# Altium PCB HCPL-3120 Gate Driver Circuit.PcbDoc
Units mm, origin at the board's own origin, x right, y up, seen from the top; angles counter-clockwise.
Board outline 71 x 57 mm, 2 copper layers (Top Layer, Bottom Layer), stack 1.1 mm thick; 42 components, 22 nets, 100 pads, 2 vias.
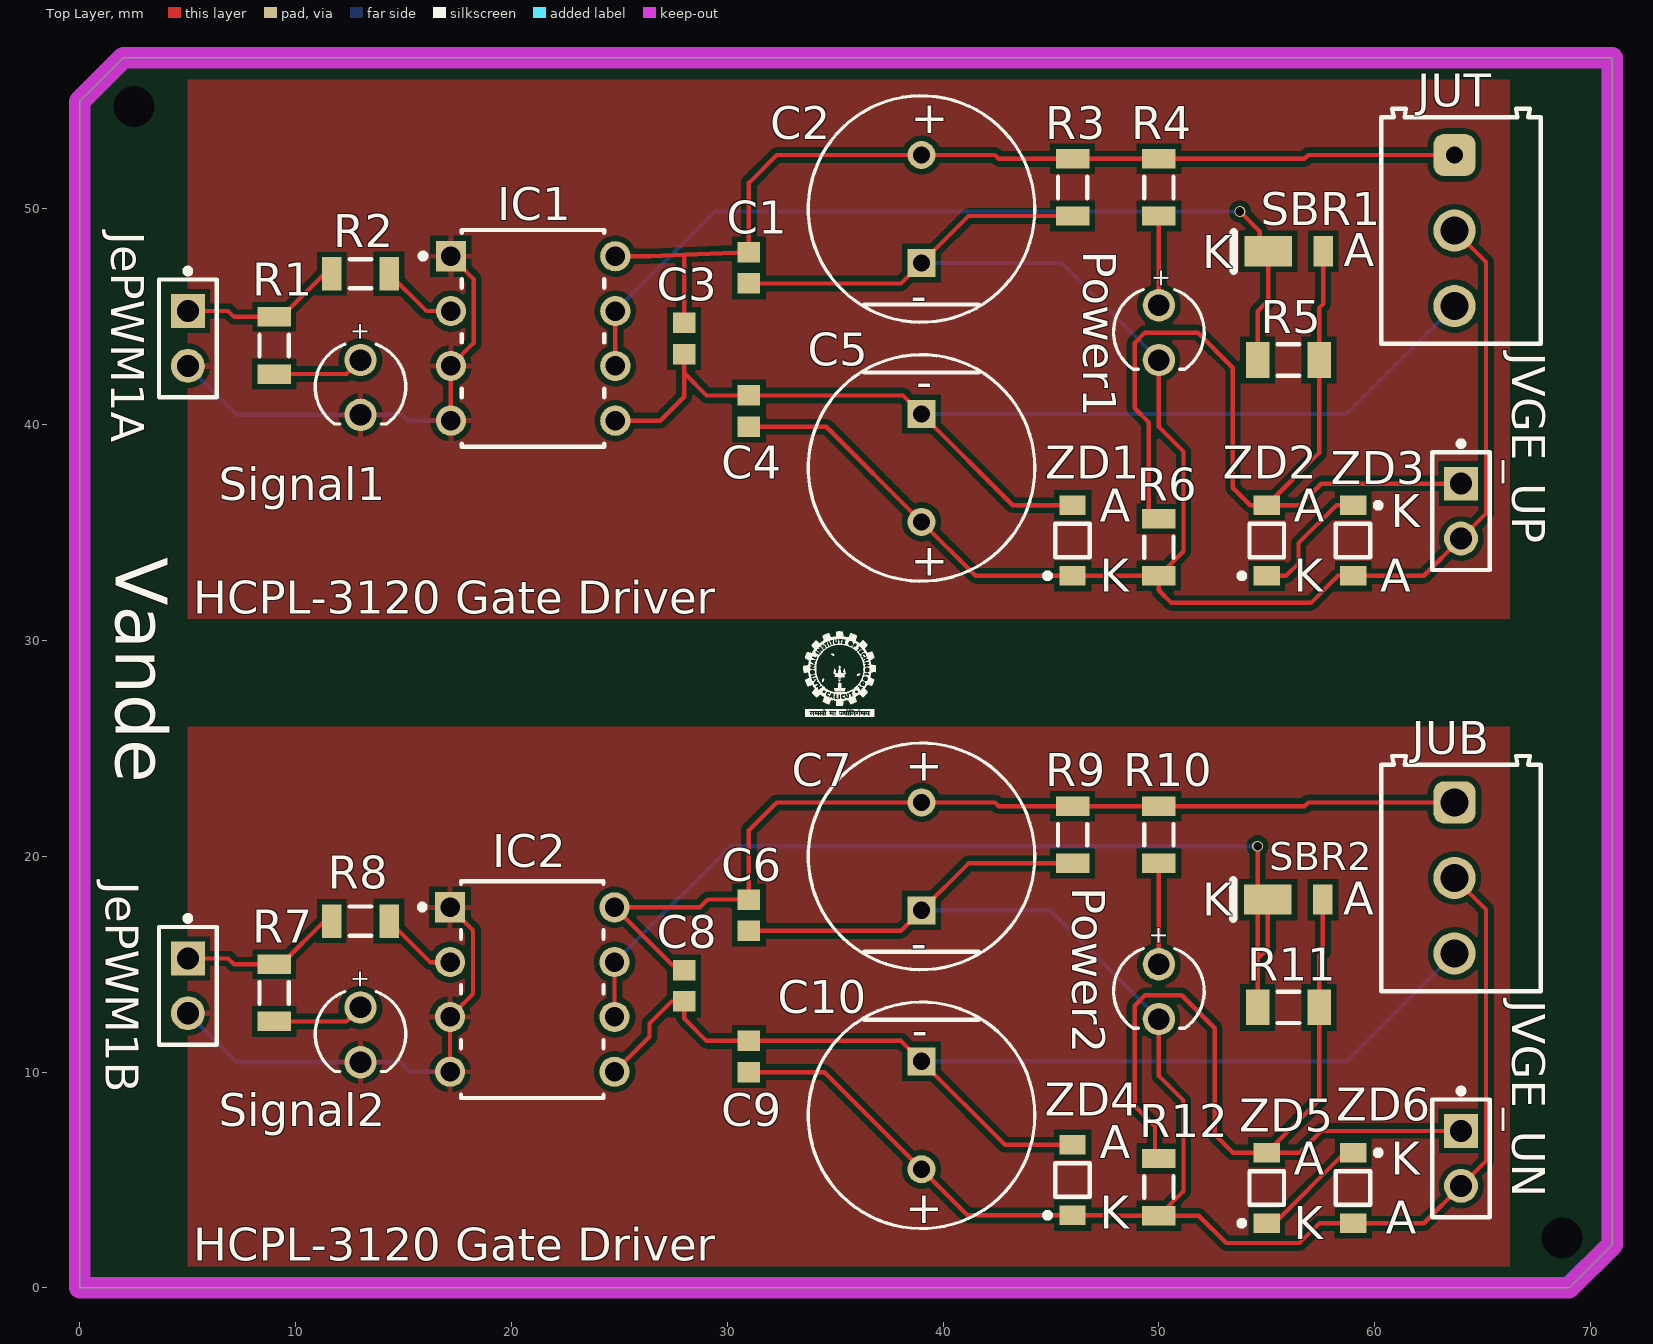
[diagram p0: Top Layer view]
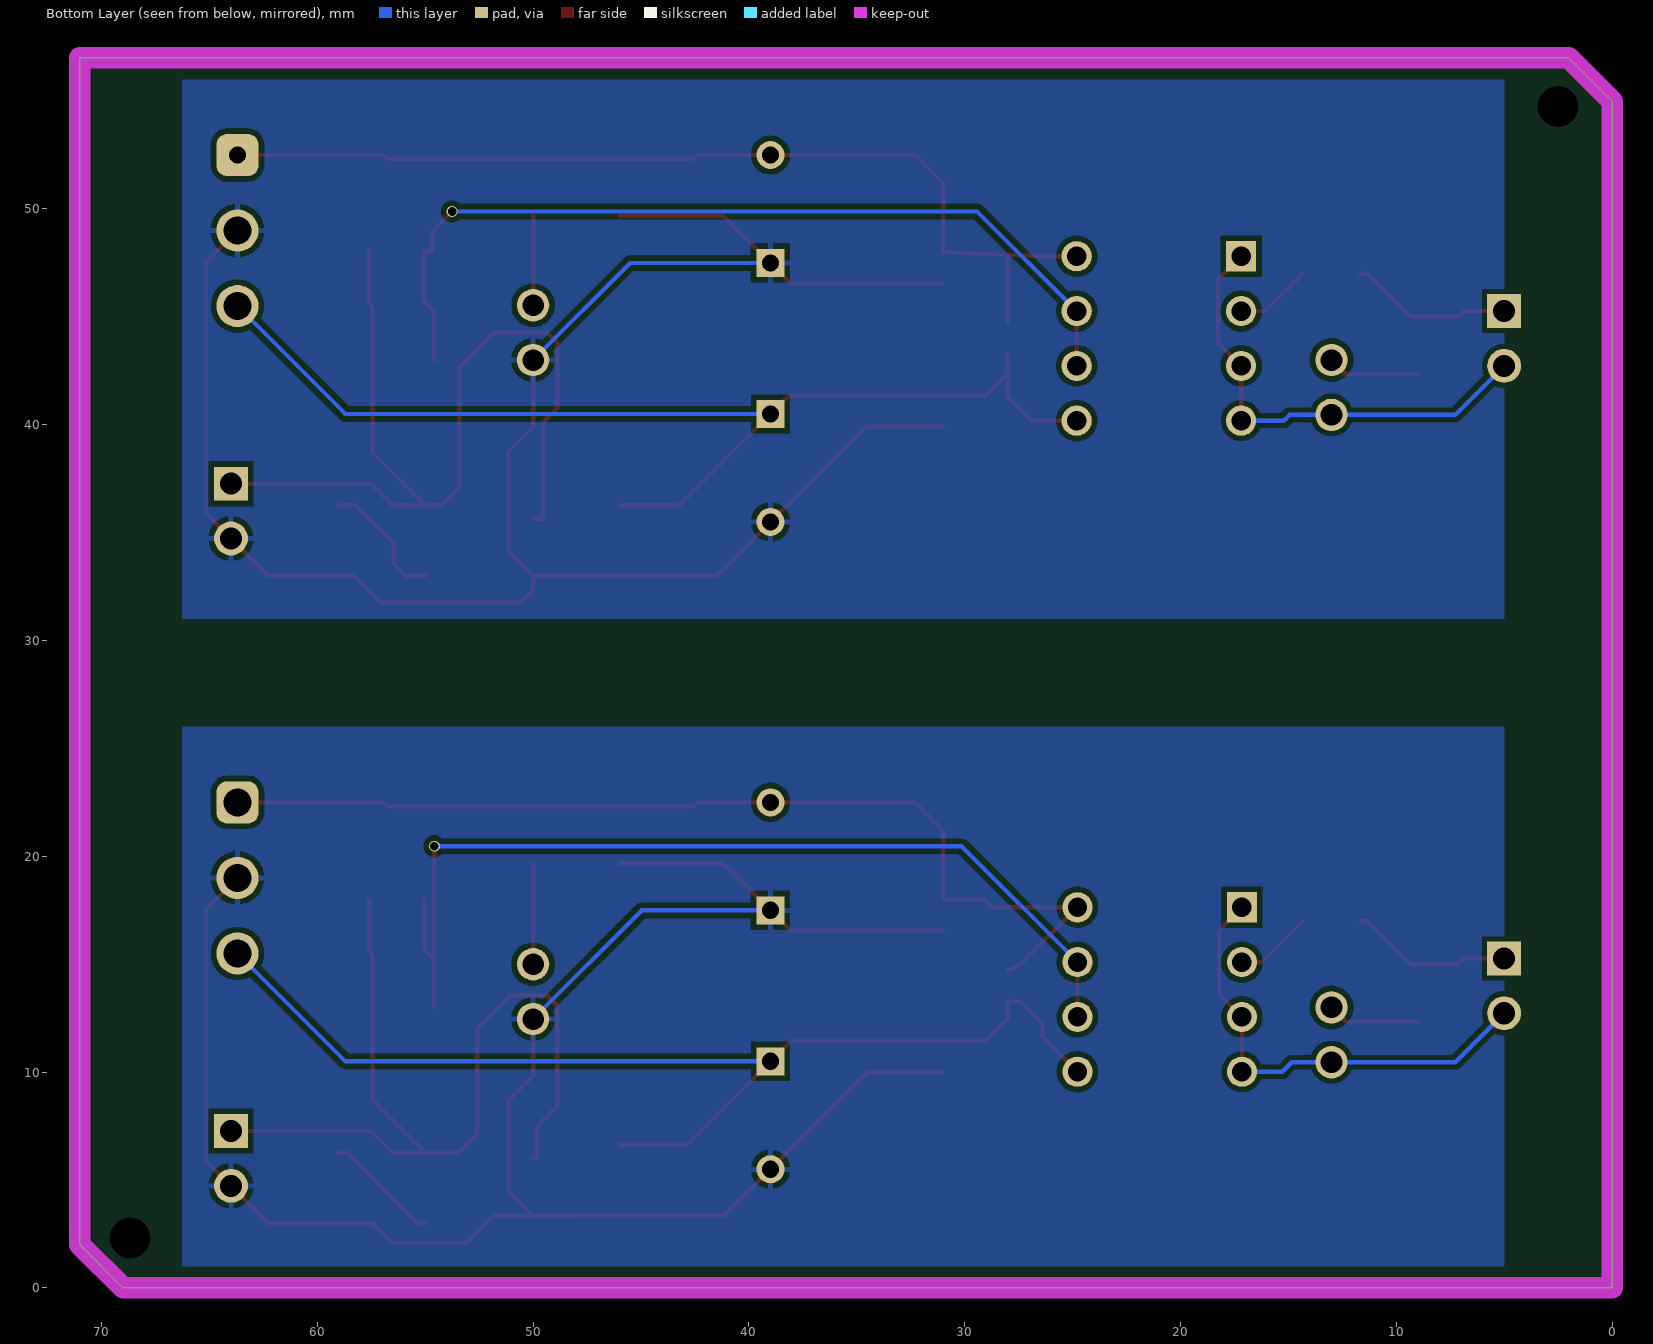
[diagram p1: Bottom Layer view, seen from below]
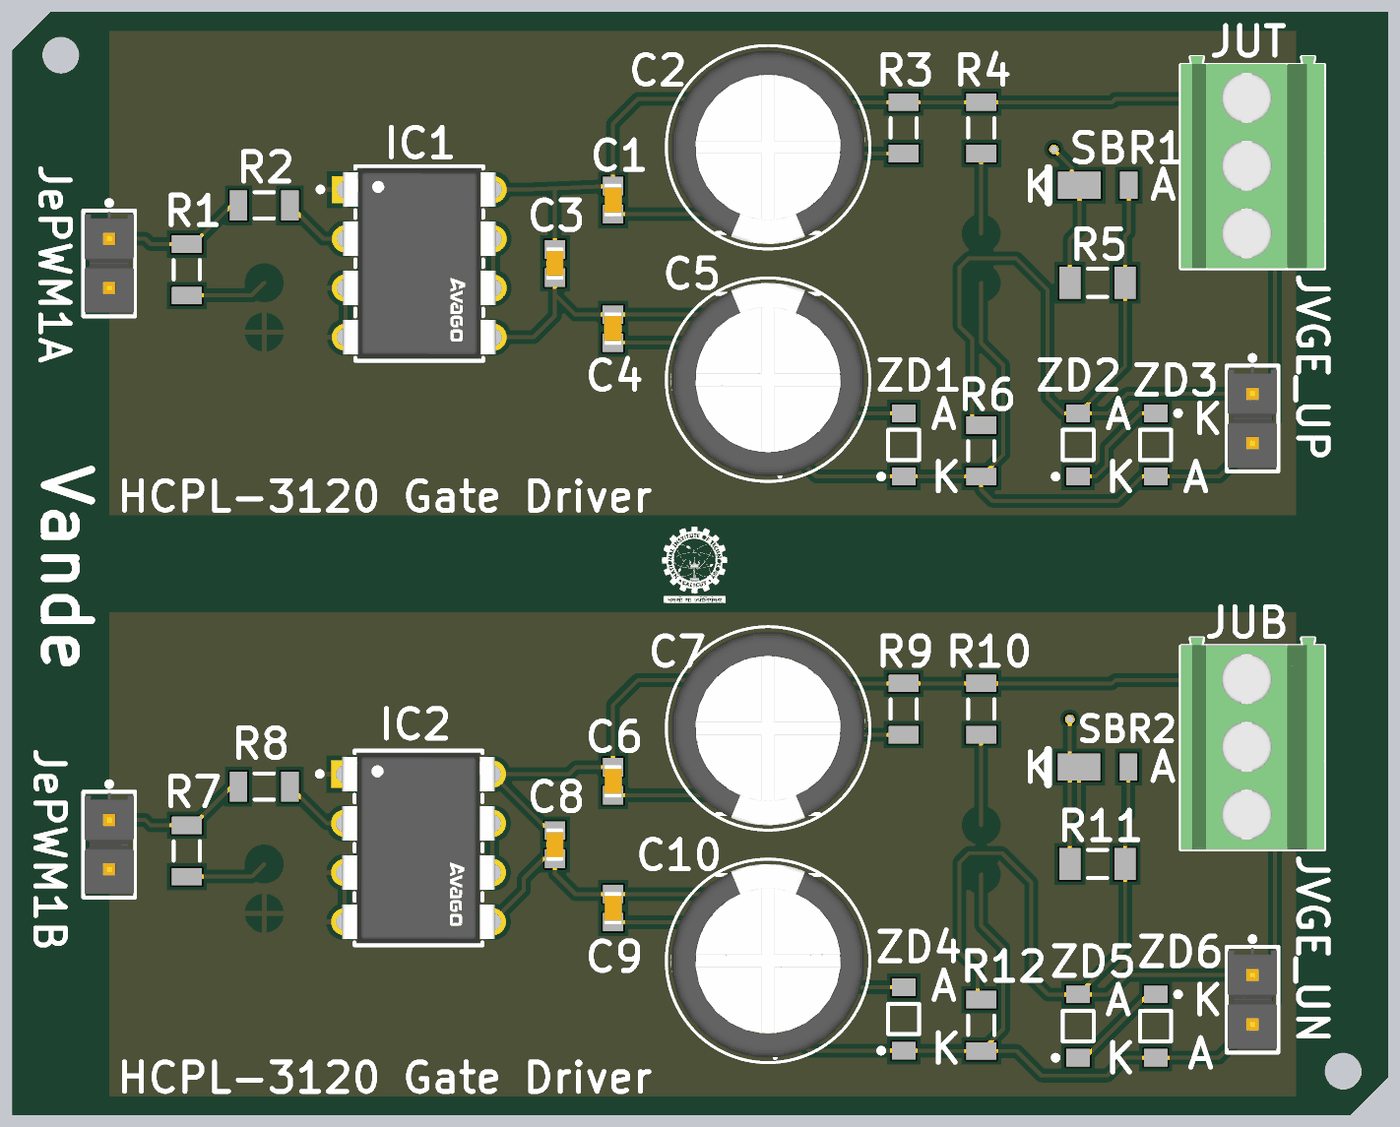
[diagram p2: 3D render of the assembled board from above, using the file's embedded part models]

## Layer stack, top to bottom
Top Solder: solder mask 0.05, SM-001, Dk 4
Top Layer: signal copper 0.1
Dielectric 1: dielectric 0.9, FR-4, Dk 4.8
Bottom Layer: signal copper 0.1
Bottom Solder: solder mask 0.05, SM-001, Dk 4

## Board outline
0,0 69,0 71,2 71,57 2,57 0,55

## Design rules (kind name [scope] priority, off if disabled: settings)
Clearance [All] p1: gap=0.25 ignorepadtopadclearanceinfootprint=FALSE
HoleSize [All] p1: absolutevalues=TRUE maxlimit=2.54 minlimit=0.254 maxpercent=80.000 minpercent=20.000
PolygonConnect [All] p1: connectstyle=Relief reliefconductorwidth=0.254 reliefentries=4 polygonreliefangle="90 Angle" airgapwidth=0.254
RoutingVias [All] p1: holewidth=0.4 width=0.5 viastyle="Through Hole" minholewidth=0.4 minwidth=0.5 maxholewidth=0.4 maxwidth=0.5
SilkToSilkClearance [All] p1: silktosilkclearance=0.01
SilkToSolderMaskClearance [IsText] p1: minsilkscreentomaskgap=0.03 clearancetoexposedcopper=FALSE
SolderMaskExpansion [All] p1: expansion=0.102 istentingtop=FALSE
Width [All] p1: maxlimit=0.5 minlimit=0.1 preferedwidth=0.2
27 further rules are at their usual default settings.

## Components (designator, comment, footprint, x,y, rotation, side; value= is the part's Value field where it differs from the comment)
C1 "GRM188R71H104KA93D" CAPC1608X90X35ML10T15 31,47.275 r270 top
C2 "EEUTA1H101" FP-RAD-TH-D_10_0_5-L_12_5-MFG 39,50 r90 top
C3 "GRM188R71H104KA93D" CAPC1608X90X35ML10T15 28,44 r270 top
C4 "GRM188R71H104KA93D" CAPC1608X90X35ML10T15 30.995,40.636 r270 top
C5 "EEUTA1H101" FP-RAD-TH-D_10_0_5-L_12_5-MFG 39,38 r270 top
C6 "GRM188R71H104KA93D" CAPC1608X90X35ML10T15 31,17.275 r270 top
C7 "EEUTA1H101" FP-RAD-TH-D_10_0_5-L_12_5-MFG 39,20 r90 top
C8 "GRM188R71H104KA93D" CAPC1608X90X35ML10T15 28,14 r270 top
C9 "GRM188R71H104KA93D" CAPC1608X90X35ML10T15 31,10.725 r270 top
C10 "EEUTA1H101" FP-RAD-TH-D_10_0_5-L_12_5-MFG 39,8 r270 top
IC1 "HCPL-3120" FP-DIP-8-MFG 21,44 r0 top
IC2 "HCPL-3120" FP-DIP-8-MFG 20.962,13.829 r0 top
JePWM1A "TSW-102-07-L-S" FP-TSW-102-07-L-S-MFG 5,44 r270 top
JePWM1B "TSW-102-07-L-S" FP-TSW-102-07-L-S-MFG 5,14 r270 top
JUB "691214110003" 691214110003#1 64,19 r270 top
JUT "691214110003" 691214110003#2 64,49 r270 top
JVGE_UN "TSW-102-07-L-S" FP-TSW-102-07-L-S-MFG 64,6 r270 top
JVGE_UP "TSW-102-07-L-S" FP-TSW-102-07-L-S-MFG 64,36 r270 top
Power1 "151031VS04000" WL-TMRC_D3.95H5.3 1320,-1225.73 r270 top
Power2 "151031VS04000" WL-TMRC_D3.95H5.3 1320,-1256.27 r270 top
R1 "ERJ-8ENF1001V" RESC3216X70X50LL05T20 9,43.675 r270 top
R2 "ERJ8ENF3300V" RESC3216X70X50LL05T20 13,47 r0 top
R3 "ERJ-8ENF1001V" RESC3216X70X50LL05T20 46,51 r270 top
R4 "ERJ-8ENF1001V" RESC3216X70X50LL05T20 50,51 r270 top
R5 "ERJ-8ENF30R0V" RESC3216X70X50NL05T20 56,43 r0 top
R6 "ERJ-8ENF1002V" RESC3216X70X50LL05T20 50,34.325 r270 top
R7 "ERJ-8ENF1001V" RESC3216X70X50LL05T20 9,13.675 r270 top
R8 "ERJ8ENF3300V" RESC3216X70X50LL05T20 13,17 r0 top
R9 "ERJ-8ENF1001V" RESC3216X70X50LL05T20 46,21 r270 top
R10 "ERJ-8ENF1001V" RESC3216X70X50LL05T20 50,21 r270 top
R11 "ERJ-8ENF30R0V" RESC3216X70X50NL05T20 56,13 r0 top
R12 "ERJ-8ENF1002V" RESC3216X70X50LL05T20 50,4.675 r270 top
SBR1 "DFLS130L-7" DIOD-POWERDI123-2_A_V 56.014,48.039 r180 top
SBR2 "DFLS130L-7" DIOD-POWERDI123-2_A_V 56,18 r180 top
Signal1 "151031SS04000" WL-TMRC_D3.95H5.3 1283,-1228.27 r270 top
Signal2 "151031SS04000" WL-TMRC_D3.95H5.3 1283,-1258.27 r270 top
ZD1 "MMSZ4688T1G" ONSC-SOD-123-2-425-04_V 46,34.635 r90 top
ZD2 "SZMMSZ4702T1G" ONSC-SOD-123-2-425-04_V 55,34.635 r90 top
ZD3 "SZMMSZ4702T1G" ONSC-SOD-123-2-425-04_V 59,34.635 r270 top
ZD4 "MMSZ4688T1G" ONSC-SOD-123-2-425-04_V 46,5 r90 top
ZD5 "SZMMSZ4702T1G" ONSC-SOD-123-2-425-04_V 55,4.635 r90 top
ZD6 "SZMMSZ4702T1G" ONSC-SOD-123-2-425-04_V 59,4.635 r270 top

## Footprints (in the part's own frame and the unit in brackets; to place one, negate y for a bottom-side part, rotate by r counter-clockwise, add the part's x,y. Pads: shape width x height; smd on the part's side, far side on the other; paste and mask are expansions set on the pad)
691214110003#1 [mm] "3.50 mm Horizontal Entry Modular, 3p"
  rrect50% 1.95x1.95 hole 1.3: 1(-3.5,-0.3)
  round 1.95 hole 1.3: 2(0,-0.3) 3(3.5,-0.3)
  silkscreen extent -5.65,-3.7 5.25,3.7, body extent -5.7,-3.7 5.25,3.7, height 8.55
691214110003#2 [mm] "3.50 mm Horizontal Entry Modular, 3p"
  rrect50% 1.95x1.95 hole 0.8: 1(-3.5,-0.3)
  round 1.95 hole 1.3: 2(0,-0.3) 3(3.5,-0.3)
  silkscreen extent -5.65,-3.7 5.25,3.7, body extent -5.7,-3.7 5.25,3.7, height 8.55
CAPC1608X90X35ML10T15 [mm] "Chip Capacitor, 2-Leads, Body 1.7x0.9mm, IPC Low Density"
  rect 0.95x1.05 smd: 1(-0.725,0) 2(0.725,0)
  body extent -0.85,-0.45 0.85,0.45, height 0.9
DIOD-POWERDI123-2_A_V [mm] "SOD, 2-Leads, Body 2.8x1.78mm"
  rect 0.9x1.4 smd: 1(-1.6,0)
  rect 2.2x1.4 smd: 2(0.95,0)
  silkscreen extent 2.55,-0.89 2.55,0.89, body extent -1.4,-0.89 1.4,0.89, height 1.01
FP-DIP-8-MFG [mm]
  rect 1.4x1.4 hole 0.9 paste-1000 mask+0: 1(-3.81,3.81)
  round 1.4 hole 0.9 paste-1000 mask+0: 2(-3.81,1.27) 3(-3.81,-1.27) 4(-3.81,-3.81) 5(3.81,-3.81) 6(3.81,-1.27) 7(3.81,1.27) 8(3.81,3.81)
  silkscreen extent -5.22,-5.02 3.3,5.02, body extent -4.61,-5.13 4.61,5.13, height 0.25
FP-RAD-TH-D_10_0_5-L_12_5-MFG [mm]
  rect 1.3x1.3 hole 0.8 paste-1000 mask+0: 1(-2.5,0)
  round 1.3 hole 0.8 paste-1000 mask+0: 2(2.5,0)
  silkscreen extent -5.25,-5.25 5.25,5.25, body extent -5.35,-5.35 5.35,5.35, height 0.25
FP-TSW-102-07-L-S-MFG [mm]
  rect 1.57x1.57 hole 1.02 paste-1000 mask+0: 1(-1.27,0)
  round 1.57 hole 1.02 paste-1000 mask+0: 2(1.27,0)
  silkscreen extent -3.25,-1.34 2.73,1.34, body extent -2.83,-1.44 2.83,1.44, height 0.25
ONSC-SOD-123-2-425-04_V [mm] "SOD, 2-Leads, Body 2.69x1.6mm"
  rect 0.91x1.22 smd: 1(-1.635,0) 2(1.635,0)
  silkscreen extent -1.76,-0.8 0.78,1.28, body extent -1.35,-0.8 1.35,0.8, height 1.35
RESC3216X70X50LL05T20 [mm] "Chip Resistor, 2-Leads, Body 3.20x1.60mm, IPC High Density"
  rect 0.9x1.55 smd: 1(-1.325,0) 2(1.325,0)
  silkscreen extent -0.5,-0.67 0.5,0.68, body extent -1.63,-0.82 1.62,0.82, height 0.7
RESC3216X70X50NL05T20 [mm] "Chip Resistor, 2-Leads, Body 3.20x1.60mm, IPC Medium Density"
  rect 1.1x1.65 smd: 1(-1.425,0) 2(1.425,0)
  silkscreen extent -0.5,-0.73 0.5,0.73, body extent -1.63,-0.82 1.62,0.82, height 0.7
WL-TMRC_D3.95H5.3 [mm] "THT Mono-color Round Color LED, 2-leads"
  round 1.5 hole 1: 1(-1271.27,-1270) 2(-1268.73,-1270)
  silkscreen extent -1272,-1272.1 -1268.31,-1267.9, body extent -1271.99,-1271.97 -1268.37,-1268.03, height 5.35

## Part data
C1 C3 C4 C6 C8 C9: library part CMP-2100-03643-1, "Chip Capacitor, 0.1 uF, +/- 10%, 50 V, -55 to 125 degC, 0603 (1608 Metric), RoHS, Tape and Reel", Capacitance=100nF, Case Code (Imperial)=0603, Case Code (Metric)=1608, Dielectric=X7R, Dielectric Material=Ceramic, Insulation Resistance=10GR, Manufacturer=Murata, Max Operating Temperature=125degC, Min Operating Temperature=-55degC, Package Description="2-Pin Surface Mount Device, Body 1.6 x 0.8 mm", Package Quantity=1, Tolerance=10%, Voltage=50V, Case/Package=0603, Contact Plating=Tin, Datasheet URL=http://psearch.en.murata.com/capacitor/product/GRM188R71H104KA93%23.pdf, Datasheet Version=42675.0, Depth=0.8mm, Height=0.8mm, Lead Free=LeadFree, Length=1.6mm, Manufacturer URL=http://www.murata.com/, Material=Ceramic, Mount=SurfaceMount, Number of Pins=2, Package Reference=0603, Packaging=TapeandReel, Radiation Hardening=No, REACH SVHC=NoSVHC, RoHSCompliant=true, Termination=SMD/SMT, Thickness=0.035inch, Voltage Rating=50V, Voltage Rating (DC)=50V, Width=0.8mm
C2 C5 C7 C10: library part CMP-05427-000114-1, "Aluminum Electrolytic Capacitors (Radial Lead Type) AEC-Q200 Qualified 100uF ±20% 50V", Capacitance=100uF, Case/Package=Radial, ESR (Equivalent Series Resistance)=180mR, Max Operating Temperature=125°C, Min Operating Temperature=-40°C, Package Quantity=200, Ripple Current=555mA, Tolerance=20%, Voltage Rating=50V, Contact Plating=Tin, Diameter=10mm, Height=12.5mm, Height - Seated (Max)=0.531inch, Impedance=180mR, Lead Diameter=0.6mm, Lead Pitch=5mm, Length=12.5mm, Life (Hours)=2000Hour, Mount="Through Hole", Packaging=Bulk, Radiation Hardening=No, REACH SVHC="No SVHC", RoHS Compliant=Yes, Series=TA, Termination=Radial, Voltage Rating (DC)=50V
IC1 IC2: "Optocoupler Drive Push-Pull 1-CH 30V 1500V 8-Pin PDIP Tube"
JePWM1A JePWM1B JVGE_UN JVGE_UP: library part CMP-02766-001428-1, "CONN HEADER VERT 2POS 2.54MM", Color=Black, Current Rating=7.6A, Max Operating Temperature=125°C, Max Voltage Rating (AC)=550V, Min Operating Temperature=-55°C, Package Quantity=1, Connector Type="Male Pin", Contact Material=Bronze, Contact Mating Length=0.23inch, Contact Plating=Gold, Contact Type="Male Pin", Depth=2.54mm, Gender=Male, Housing Color=Black, Housing Material=Polyester, Lead Free="Lead Free", Length=5.08mm, Max Current Rating=7.6A, Mount="Through Hole", Number of Contacts=2, Number of Positions=2, Number of Rows=1, Orientation=Straight, Packaging=Bulk, Pitch=2.54mm, Radiation Hardening=No, REACH SVHC="No SVHC", RoHS Compliant=Yes, Series=TSW, Termination=Solder, Voltage Rating=550V, Width=2.54mm
JUB JUT: library part CMP-1502-02466-2, Color="Blue, Green", Current=10A, Max Operating Temperature=105°C, Min Operating Temperature=-40°C, Voltage=300V, Contact Material=Brass, Contact Plating="Brass, Tin", Current Rating=10A, Height=12.2mm, Housing Material=Nylon, Lead Pitch=3.5mm, Length=7.4mm, Mount="Through Hole", NexarPartId=18818289, Number of Contacts=3, Number of Levels=1, Number of Pins=3, Number of Positions Per Level=3, Packaging=Box, Pitch=3.5052mm, Plating="Brass, Steel", REACH SVHC=Unknown, RoHS=Compliant, Stripping Length=-6mm, Termination=Screw, Voltage Rating=300V, Width=10.9mm, Wire Gauge (Max)=24AWG, Wire Gauge (Min)=16AWG, Wire/Cable Gauge=24AWG
Power1 Power2: library part CMP-1488-00001-2, "Led, Green, T-1 (3Mm), 570 Nm, 2.1 V, 30 Ma, 120 Mcd", Case/Package=Radial, Color=Green, Forward Current=100mA, Forward Voltage=2.1V, Max Operating Temperature=85°C, Max Reverse Voltage (DC)=5V, Min Operating Temperature=-40°C, Test Current=20mA, Dominant Wavelength=570nm, Height=5.3mm, Length=3mm, Lens Size=3mm, Lens Style="Circular, Diffused, Round", Luminous Intensity=120mcd, Mount="Through Hole", NexarPartId=29717804, Number of Pins=2, Packaging=Bulk, Peak Wavelength=573nm, REACH SVHC=Unknown, RoHS=Compliant, Viewing Angle=40°, Wavelength=570nm, Width=3mm
R1 R3 R4 R7 R9 R10: library part CMP-2003-00017-1, "Res Thick Film 1206 1K Ohm 1% 0.25W(1/4W) ±100ppm/C Pad SMD Automotive T/R", Manufacturer=Panasonic, Part Number=ERJ-8ENF1001V
R2 R8: library part CMP-2003-00307-1, "Res Thick Film 1206 330 Ohm 1% 0.25W ±100ppm/°C Molded SMD Punched Carrier T/R", Manufacturer=Panasonic, Part Number=ERJ8ENF3300V
R5 R11: library part CMP-2003-00294-1, "Res Thick Film 1206 30 Ohm 1% 0.25W ±100ppm/°C Molded SMD Punched Carrier T/R", Manufacturer=Panasonic, Part Number=ERJ-8ENF30R0V
R6 R12: library part CMP-2003-00018-1, "Res Thick Film 1206 10K Ohm 1% 0.25W(1/4W) ±100ppm/C Pad SMD Automotive T/R", Manufacturer=Panasonic, Part Number=ERJ-8ENF1002V
SBR1 SBR2: library part CMP-2000-07448-1, "Schottky Barrier Rectifier, 30 V, 1 A, -40 to 125 degC, 2-Pin SMD, RoHS, Tape and Reel", Average Rectified Current=1A, Capacitance=76pF, Case\/Package=SMD/SMT, Forward Voltage=360mV, Manufacturer="Diodes Inc", Max Forward Surge Current (Ifsm)=50A, Max Operating Temperature=125degC, Max Power Dissipation=1.67W, Max Repetitive Reverse Voltage (Vrrm)=30V, Min Operating Temperature=-40degC, Package Description="2-Pin Small Outline Diode, Body 2.8 x 1.78 mm", Package Quantity=3000, Package Reference=POWERDI123-2_A, Peak Reverse Current=1mA, Contact Plating=Matte, Current Rating=1A, Datasheet URL=https://www.diodes.com/assets/Datasheets/ds30492.pdf, Datasheet Version="Rev. 4-2, 06/2009", Element Configuration=Single, Forward Current=1A, Height=0.98mm, Lead Free=LeadFree, Length=2.8mm, Manufacturer URL=http://www.diodes.com/, Mount=SurfaceMount, Mounting Technology=SurfaceMount, Number of Pins=2, Output Current=1A, Packaging=TapeandReel, Peak Non-Repetitive Surge Current=50A, Polarity=Standard, Radiation Hardening=No, REACH SVHC=NoSVHC, Reverse Voltage (DC)=30V, RoHSCompliant=true, Termination=SMD/SMT, Voltage Rating (DC)=30V, Width=1.78mm
Signal1 Signal2: library part CMP-1488-00005-2, "Led, Red, T-1 (3Mm), 635 Nm, 2 V, 30 Ma, 160 Mcd", Case/Package=Radial, Color=Red, Forward Current=100mA, Forward Voltage=2V, Max Operating Temperature=85°C, Max Reverse Voltage (DC)=5V, Min Operating Temperature=-40°C, Test Current=20mA, Dominant Wavelength=635nm, Height=5.3mm, Length=3mm, Lens Size=3mm, Lens Style="Circular, Diffused, Round", Luminous Intensity=160mcd, Mount="Through Hole", NexarPartId=29717802, Packaging=Bulk, Peak Wavelength=640nm, REACH SVHC=Unknown, RoHS=Compliant, Viewing Angle=40°, Wavelength=635nm, Width=3mm
ZD1 ZD4: library part CMP-1060-00561-1, "Zener Voltage Regulator, 500 mW, 2-Pin SOD-123, Pb-Free, Tape and Reel", Manufacturer="On Semiconductor", ComponentLink1Description="Manufacturer URL", ComponentLink1URL=http://www.onsemi.com/, ComponentLink2Description=Datasheet, ComponentLink2URL=http://www.onsemi.com/pub_link/Collateral/MMSZ4678T1-D.PDF, ComponentLink3Description="Package Specification", ComponentLink3URL=http://www.onsemi.com/pub_link/Collateral/425-04.PDF, DatasheetVersion="Rev. 9", Mounting Technology="Surface Mount", P Max (W)=0.5, PackageDescription="2-Pin SOD, Body 1.6 x 2.69 mm", PackageReference=SOD-123-2-425-04, PackageVersion="Rev. G, 10/2009", Packing="Tape and Reel", PartNumber=MMSZ4688T1G, RoHS=Pb-Free, VZ Typ (V)=4.7
ZD2 ZD3 ZD5 ZD6: library part CMP-1060-00300-1, "Zener Voltage Regulator, 500 mW, 2-Pin SOD-123, Pb-Free, Tape and Reel", Manufacturer="On Semiconductor", ComponentLink1Description="Manufacturer URL", ComponentLink1URL=http://www.onsemi.com/, ComponentLink2Description=Datasheet, ComponentLink2URL=http://www.onsemi.com/pub_link/Collateral/MMSZ4678T1-D.PDF, ComponentLink3Description="Package Specification", ComponentLink3URL=http://www.onsemi.com/pub_link/Collateral/425-04.PDF, DatasheetVersion="Rev. 9", Mounting Technology="Surface Mount", P Max (W)=0.5, PackageDescription="2-Pin SOD, Body 1.6 x 2.69 mm", PackageReference=SOD-123-2-425-04, PackageVersion="Rev. G, 10/2009", Packing="Tape and Reel", PartNumber=SZMMSZ4702T1G, RoHS=Pb-Free, VZ Typ (V)=15

## Free pads (board coordinates)
  round 0 hole 1.9 unplated: 1(68.675,2.305) 2(2.5,54.75)

## Via types
v1: diameter 0.5, hole 0.4, Top Layer to Bottom Layer, 2 vias

## Nets (pads, with @x,y where several pads share a name; then routed paths per layer and width w, separated by ;. In a path a pad name is that pad's centre, name@x,y a point inside that pad or via, vN(x,y) a via of type N, cw(c..) or ccw(c..) an arc to the next point about the centre after c; other vN are vias at no path point)
DC-: C6.2 C7.1 C9.2 C10.2 JUB.2 JVGE_UN.2 Power2.2 R9.2 R12.2 ZD4.1 ZD6.2 | length 92.2
  Top Layer w0.2: C9.2 34.5,10 C10.2 41.135,3.365 ZD4.1 47.988,3.365 48.003,3.35 R12.2 ; C6.2 38.05,16.55 C7.1 41.175,19.675 R9.2 ; Power2.2 50,9.822 51.137,8.685 51.137,4.487 R12.2 ; JUB.2 65.158,17.542 65.158,5.888 JVGE_UN.2 62.27,3 ZD6.2 57.441,3 56.522,2.081 53.117,2.081 51.848,3.35 R12.2
  Bottom Layer w0.2: C7.1 44.96,17.5 Power2.2
DSP_GND1: IC1.1 IC1.3 IC1.4 JePWM1A.2 Signal1.2 | length 21.7
  Top Layer w0.2: IC1.4 IC1.3 18.244,43.784 18.244,46.756 IC1.1
  Bottom Layer w0.2: JePWM1A.2 7.27,40.46 Signal1.2 14.942,40.46 15.212,40.19 IC1.4
DSP_GND2: IC2.1 IC2.3 IC2.4 JePWM1B.2 Signal2.2 | length 21.8
  Top Layer w0.2: IC2.4 IC2.3 18.219,13.626 18.219,16.572 IC2.1
  Bottom Layer w0.2: JePWM1B.2 7.27,10.46 Signal2.2 14.841,10.46 15.282,10.019 IC2.4
NetIC1_2: IC1.2 R2.2 | length 3.6
  Top Layer w0.2: R2.2 16.055,45.27 IC1.2
NetIC1_6: IC1.6 IC1.7 R5.1 SBR1.2 | length 41.3
  Top Layer w0.2: IC1.6 IC1.7 ; v1(53.753,49.884) 54.668,48.969 54.668,48.039 SBR1.2 55.064,45.75 54.575,45.261 R5.1
  Bottom Layer w0.2: IC1.7 29.424,49.884 v1(53.753,49.884)
NetIC2_2: IC2.2 R8.2 | length 3.6
  Top Layer w0.2: R8.2 16.226,15.099 IC2.2
NetIC2_6: IC2.6 IC2.7 R11.1 SBR2.2 | length 45
  Top Layer w0.2: IC2.6 IC2.7 ; R11.1 54.575,15.238 ; v1(54.575,20.471) 54.575,15.238 ; SBR2.2 55.05,15.713 54.575,15.238
  Bottom Layer w0.2: IC2.7 30.144,20.471 v1(54.575,20.471)
NetJePWM1A_1: JePWM1A.1 R1.1 R2.1 | length 7.6
  Top Layer w0.2: JePWM1A.1 6.865,45.27 7.135,45 R1.1 9.329,45 11.329,47 R2.1
NetJePWM1B_1: JePWM1B.1 R7.1 R8.1 | length 7.6
  Top Layer w0.2: JePWM1B.1 6.865,15.27 7.135,15 R7.1 9.329,15 11.329,17 R8.1
NetJVGE_UN_1: JVGE_UN.1 R11.2 R12.1 SBR2.1 ZD5.2 | length 42.1
  Top Layer w0.2: R12.1 49.816,6 49.816,7.491 48.877,8.431 48.877,13.079 49.359,13.562 51.061,13.562 52.585,12.038 52.585,7.108 53.423,6.27 ZD5.2 ; SBR2.1 57.6,15.566 57.425,15.391 R11.2 57.425,8.695 ZD5.2 ; JVGE_UN.1 57.522,7.27 56.522,6.27 ZD5.2
NetJVGE_UP_1: JVGE_UP.1 R5.2 R6.1 SBR1.1 ZD2.2 | length 44
  Top Layer w0.2: R6.1 49.537,35.65 49.537,40.105 48.877,40.765 48.877,43.788 49.359,44.27 51.798,44.27 53.423,42.645 53.423,37.083 54.236,36.27 ZD2.2 ; SBR1.1 57.614,45.602 57.425,45.413 R5.2 57.425,38.695 ZD2.2 ; JVGE_UP.1 57.522,37.27 56.522,36.27 ZD2.2
NetPower1_1: Power1.1 R4.2 | length 4.1
  Top Layer w0.2: Power1.1 R4.2
NetPower2_1: Power2.1 R10.2 | length 4.7
  Top Layer w0.2: Power2.1 R10.2
NetR1_2: R1.2 Signal1.1 | length 4.3
  Top Layer w0.2: R1.2 12.35,42.35 Signal1.1
NetR7_2: R7.2 Signal2.1 | length 4.3
  Top Layer w0.2: R7.2 12.35,12.35 Signal2.1
NetZD2_1: ZD2.1 ZD3.1 | length 5.9
  Top Layer w0.2: ZD2.1 55.894,33 56.471,33.577 56.471,34.517 58.224,36.27 ZD3.1
NetZD5_1: ZD5.1 ZD6.1 | length 5.4
  Top Layer w0.2: ZD5.1 55.354,3 58.624,6.27 ZD6.1
U_G: C1.2 C2.1 C4.2 C5.2 JUT.2 JVGE_UP.2 Power1.2 R3.2 R6.2 ZD1.1 ZD3.2 | length 93.5
  Top Layer w0.2: C4.2 34.589,39.911 C5.2 41.5,33 ZD1.1 R6.2@49.994,33 ; C1.2 38.05,46.55 C2.1 41.175,49.675 R3.2 ; Power1.2 50,39.896 51.137,38.759 51.137,34.137 R6.2 R6.2@49.994,33 ; JUT.2 65.158,47.542 65.158,35.888 JVGE_UP.2 62.27,33 ZD3.2 58.3,33 57.048,31.748 50.578,31.748 49.994,32.332 R6.2@49.994,33
  Bottom Layer w0.2: C2.1 45.5,47.5 Power1.2
VCC_U_B: C6.1 C7.2 C8.1 IC2.8 JUB.1 R9.1 R10.1 | length 47.3
  Top Layer w0.2: C8.1 27.414,14.997 IC2.8 28.734,17.639 29.095,18 C6.1 31,21.21 32.29,22.5 C7.2 42.4,22.5 42.575,22.325 R9.1 R10.1 56.751,22.325 56.926,22.5 JUB.1
VCC_U_T: C1.1 C2.2 C3.1 IC1.8 JUT.1 R3.1 R4.1 | length 45.9
  Top Layer w0.2: IC1.8 26.419,47.81 28,47.876 ; C3.1 28,47.876 ; JUT.1 56.926,52.5 56.751,52.325 R4.1 47.988,52.325 R3.1 42.575,52.325 42.4,52.5 C2.2 32.29,52.5 31,51.21 C1.1 28,47.876
VEE_U_B: C8.2 C9.1 C10.1 IC2.5 JUB.3 ZD4.2 | length 52.9
  Top Layer w0.2: IC2.5 26.398,11.645 26.398,12.259 27.414,13.275 C8.2 28,12.489 29.039,11.45 C9.1 38.05,11.45 C10.1 42.865,6.635 ZD4.2
  Bottom Layer w0.2: C10.1 58.7,10.5 JUB.3
VEE_U_T: C3.2 C4.1 C5.1 IC1.5 JUT.3 ZD1.2 | length 52.9
  Top Layer w0.2: IC1.5 26.891,40.19 28,41.299 28,42.4 ; C3.2 28,42.4 ; ZD1.2 43.23,36.27 C5.1 38.139,41.361 C4.1 29.039,41.361 28,42.4
  Bottom Layer w0.2: C5.1 58.7,40.5 JUT.3

## Polygon pours and split planes (outlines as drawn)
DSP_GND2 on Top Layer "DSP_GND2_L01_P012" (solid, pour order 12): 5,26 5,1 66.25,1 66.25,26
DSP_GND1 on Top Layer "DSP_GND1_L01_P008" (solid, pour order 8): 5,56 5,31 66.25,31 66.25,56
DC- on Bottom Layer "DC-_L02_P013" (solid, pour order 13): 5,26 5,1 66.25,1 66.25,26
U_G on Bottom Layer "U_G_L02_P009" (solid, pour order 9): 5,56 5,31 66.25,31 66.25,56

## Keep-outs
Keep-Out Layer:
  the board outline again, w1

## Silkscreen, mask and mechanical layers (free items; w line width, h text height)
Top Overlay:
  drawing of 19 lines, arcs and shapes, not listed
  text "+" at 38.504,53.5 h1.52
  text "A" at 58.568,47.343 h1.52
  text "K" at 52.004,47.254 h1.52
  text "-" at 38.504,45.242 h1.52
  text "-" at 38.754,41.242 h1.52
  text "A" at 47.254,35.504 h1.52
  text "A" at 56.254,35.504 h1.52
  text "K" at 60.754,35.254 h1.52
  text "Vande" at 1.65,33.85 h2.4 r270
  text "+" at 38.504,33 h1.52
  text "K" at 47.254,32.254 h1.52
  text "K" at 56.254,32.254 h1.52
  text "A" at 60.254,32.254 h1.52
  text "HCPL-3120 Gate Driver" at 5.254,31.254 h1.52
  text "+" at 38.254,23.5 h1.52
  text "A" at 58.554,17.304 h1.52
  text "K" at 52.004,17.254 h1.52
  text "-" at 38.504,15.242 h1.52
  text "-" at 38.556,11.195 h1.52
  text "A" at 47.254,6.004 h1.52
  text "A" at 56.254,5.254 h1.52
  text "K" at 60.754,5.254 h1.52
  text "+" at 38.254,3 h1.52
  text "K" at 47.254,2.754 h1.52
  text "A" at 60.504,2.504 h1.52
  text "K" at 56.254,2.254 h1.52
  text "HCPL-3120 Gate Driver" at 5.254,1.254 h1.52
Top Component Center:
  drawing of 7 lines, arcs and shapes, not listed

## Text inside footprints (layer, text, board x,y; h text height)
Power1: Top Overlay "+" at 49.75,47.25 h0.8 r270
Power2: Top Overlay "+" at 49.65,16.78 h0.8 r270
Signal1: Top Overlay "+" at 12.65,44.78 h0.8 r270
Signal2: Top Overlay "+" at 12.65,14.78 h0.8 r270